# Altium PCB R100.230.010.000-00 Invertor.PcbDoc (part 1 of 2)
Units mm, origin at the board's own origin, x right, y up, seen from the top; angles counter-clockwise.
Board outline 157 x 220 mm, 2 copper layers (Top, Bottom); 111 components, 54 nets, 289 pads, 1436 vias.
Unrouted connection lines stored in the file: 3.
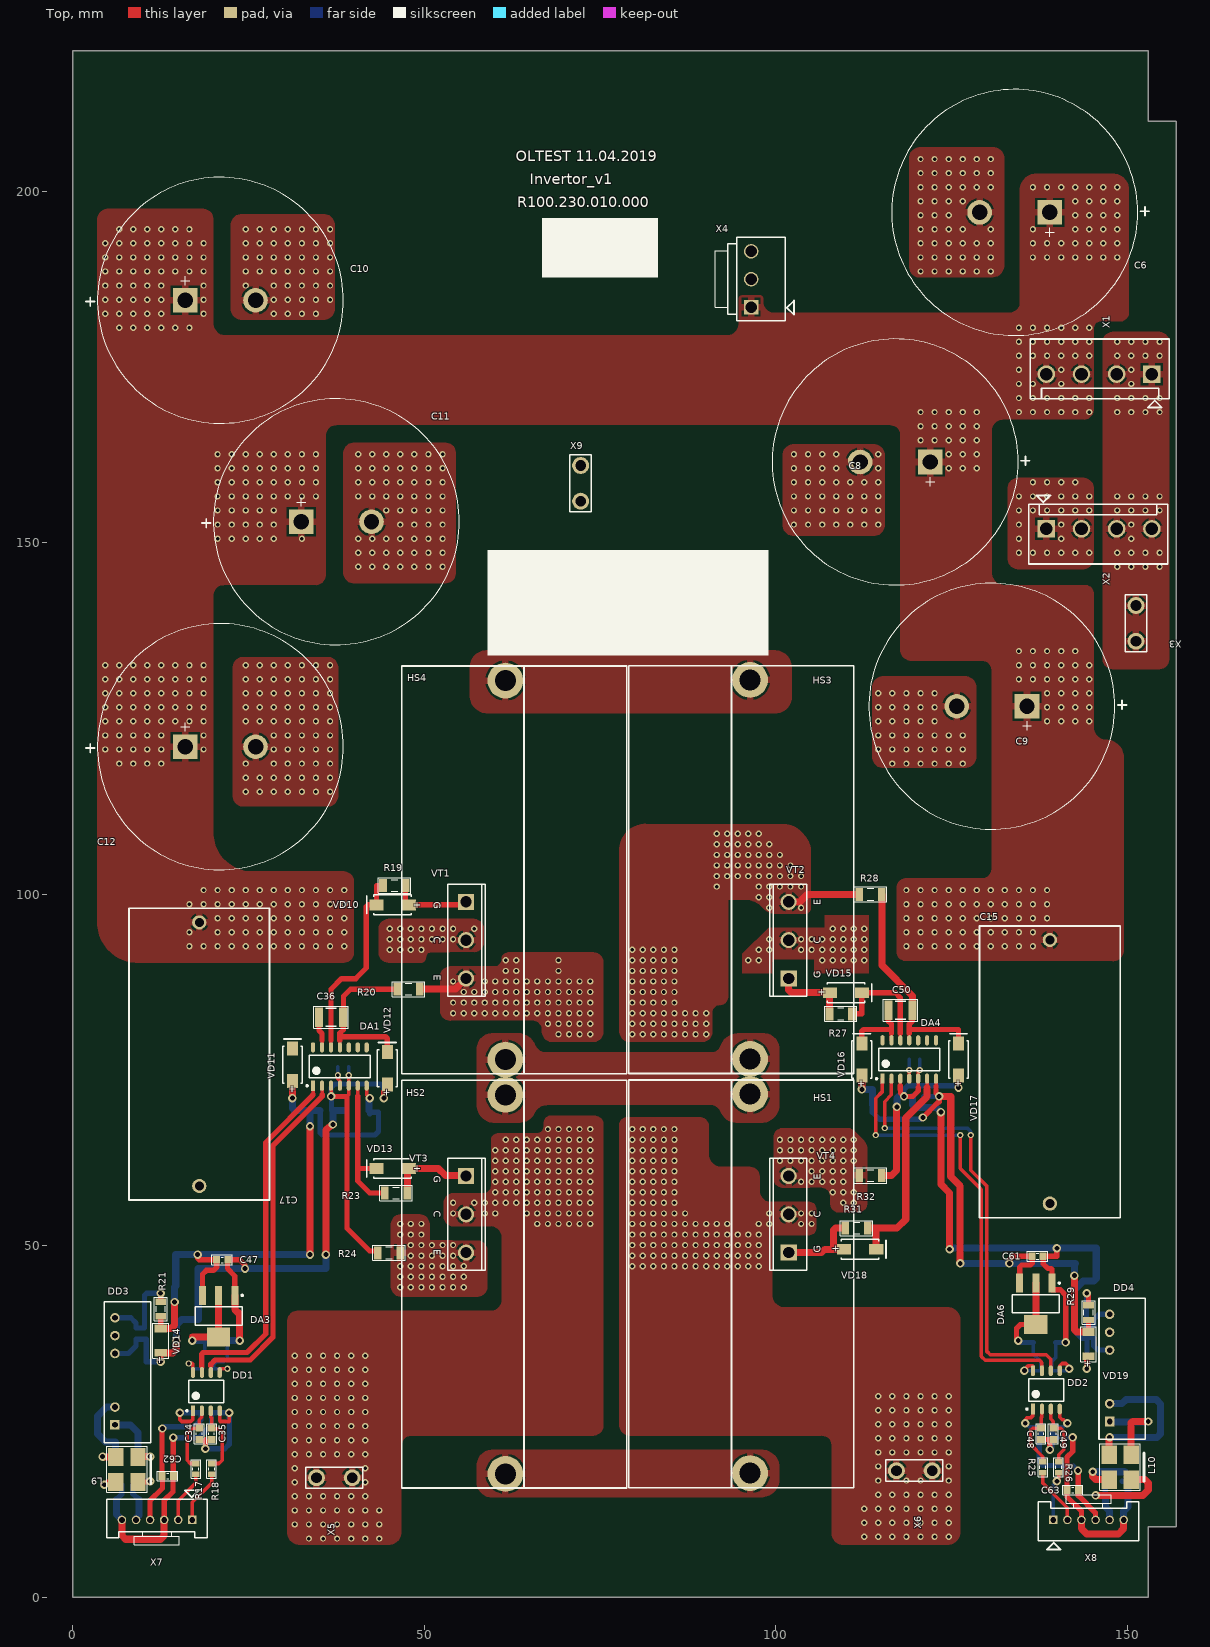
[diagram p0: Top view]
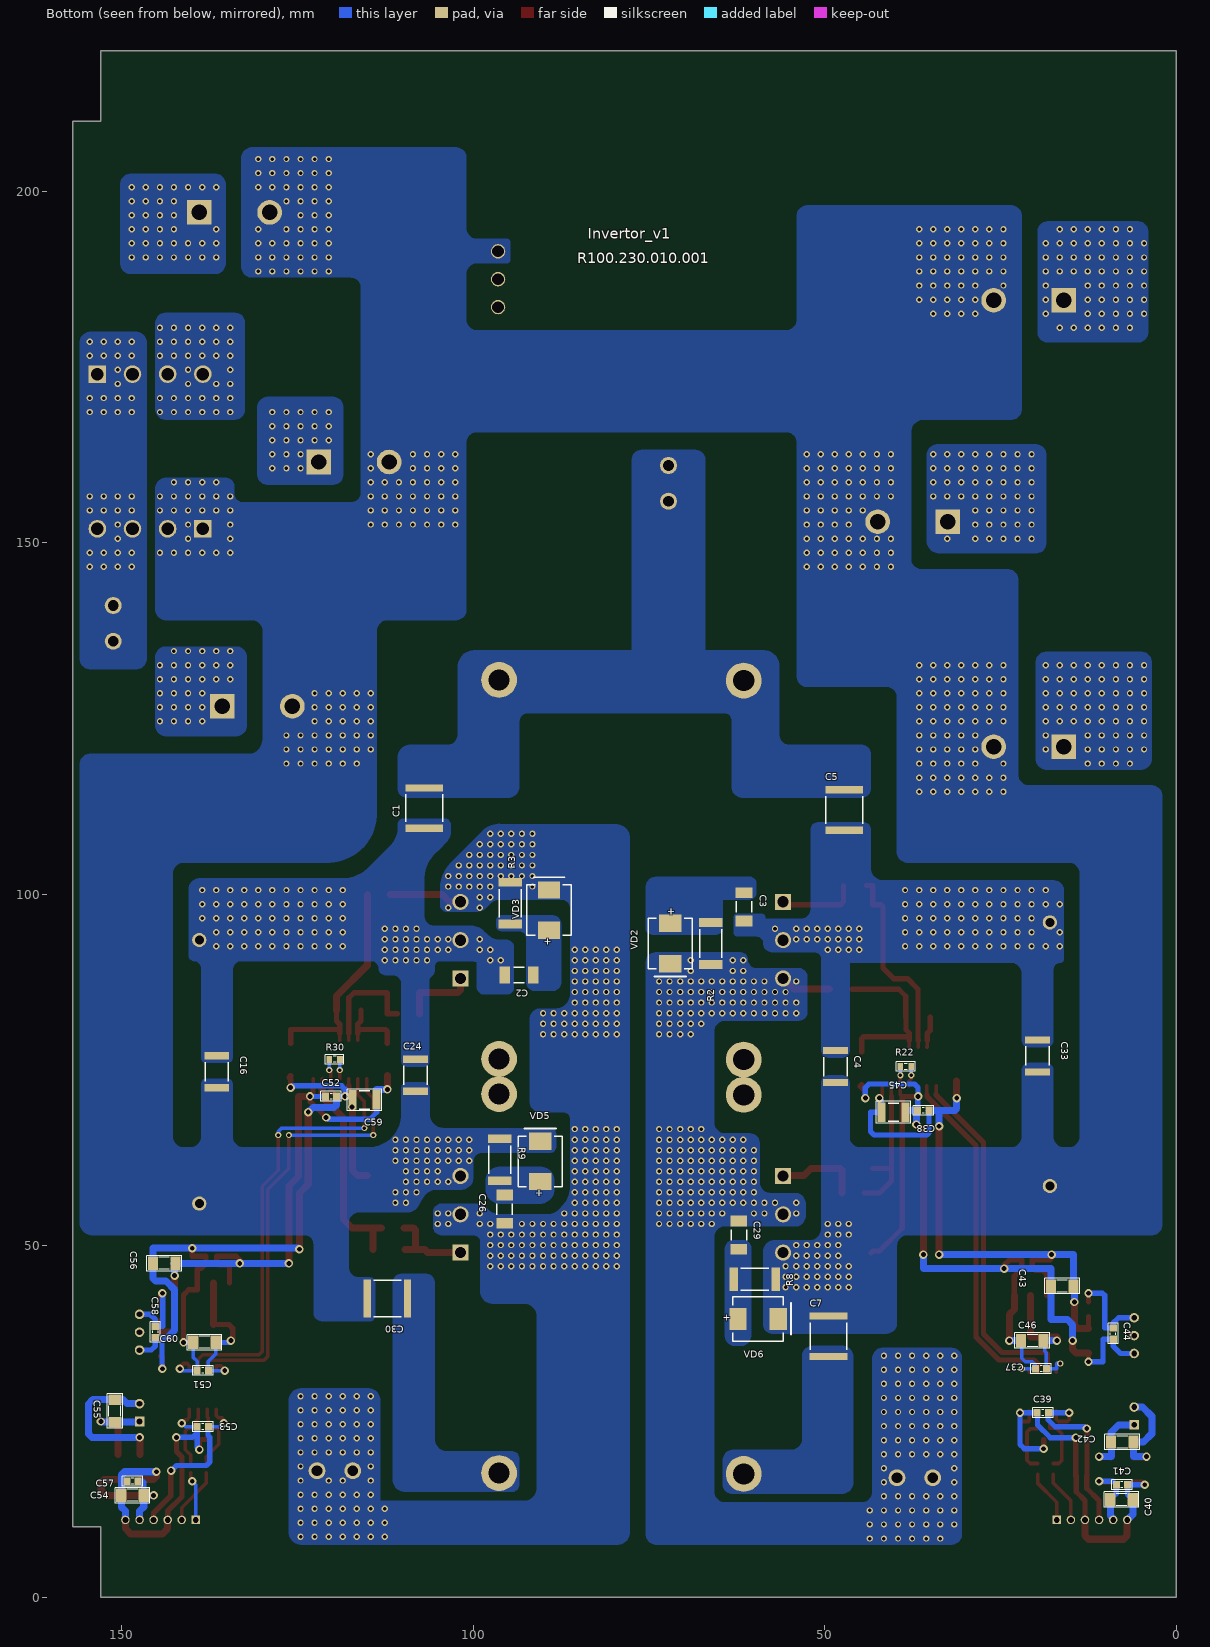
[diagram p1: Bottom view, seen from below]
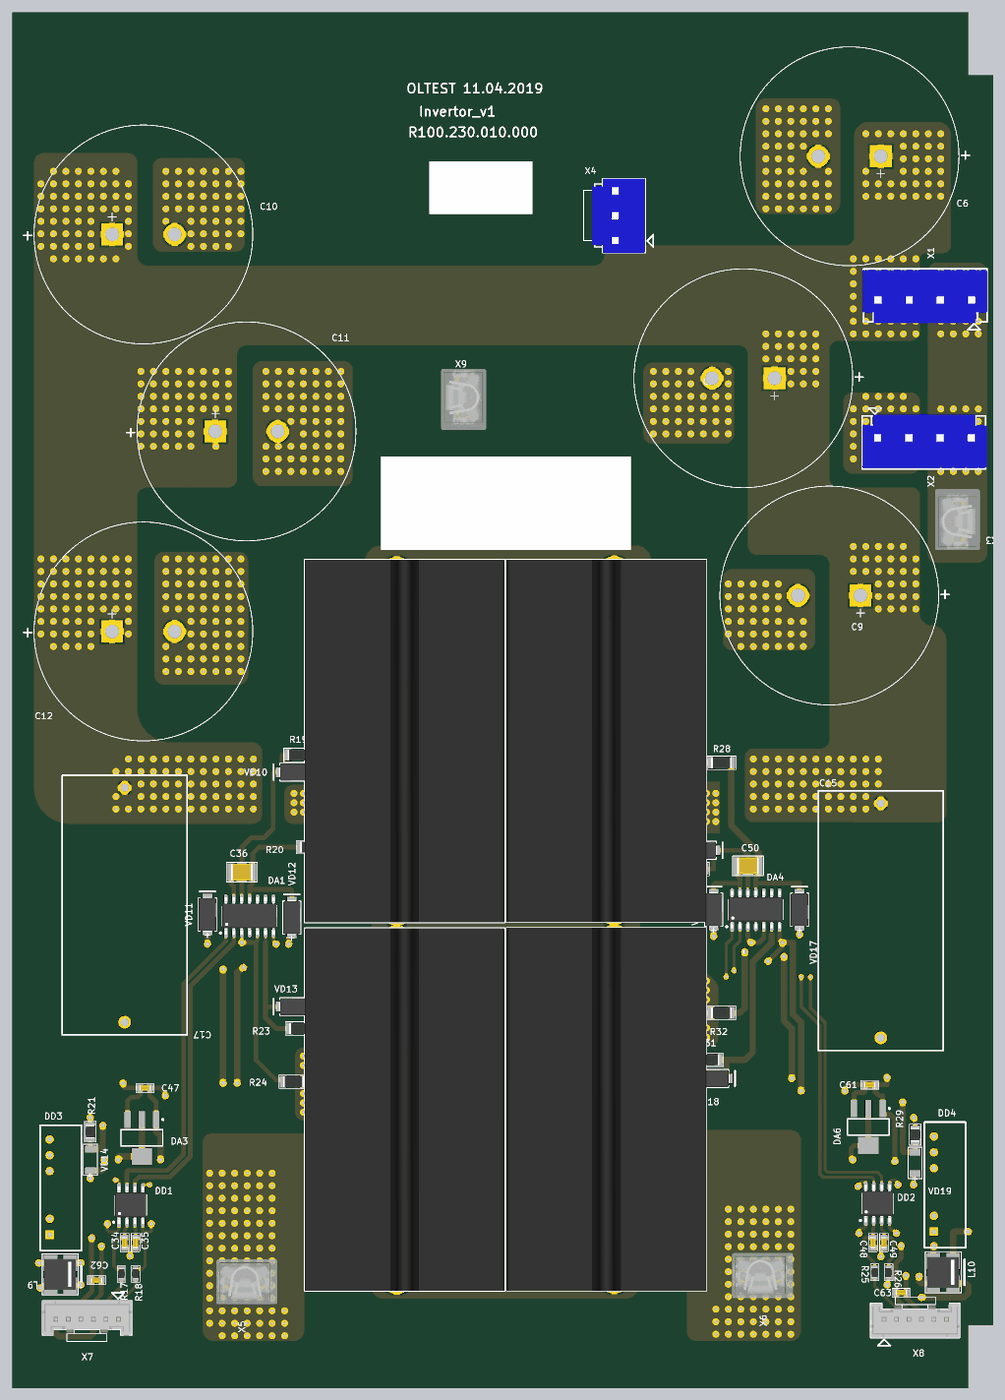
[diagram p3: 3D render of the assembled board from above, using the file's embedded part models]
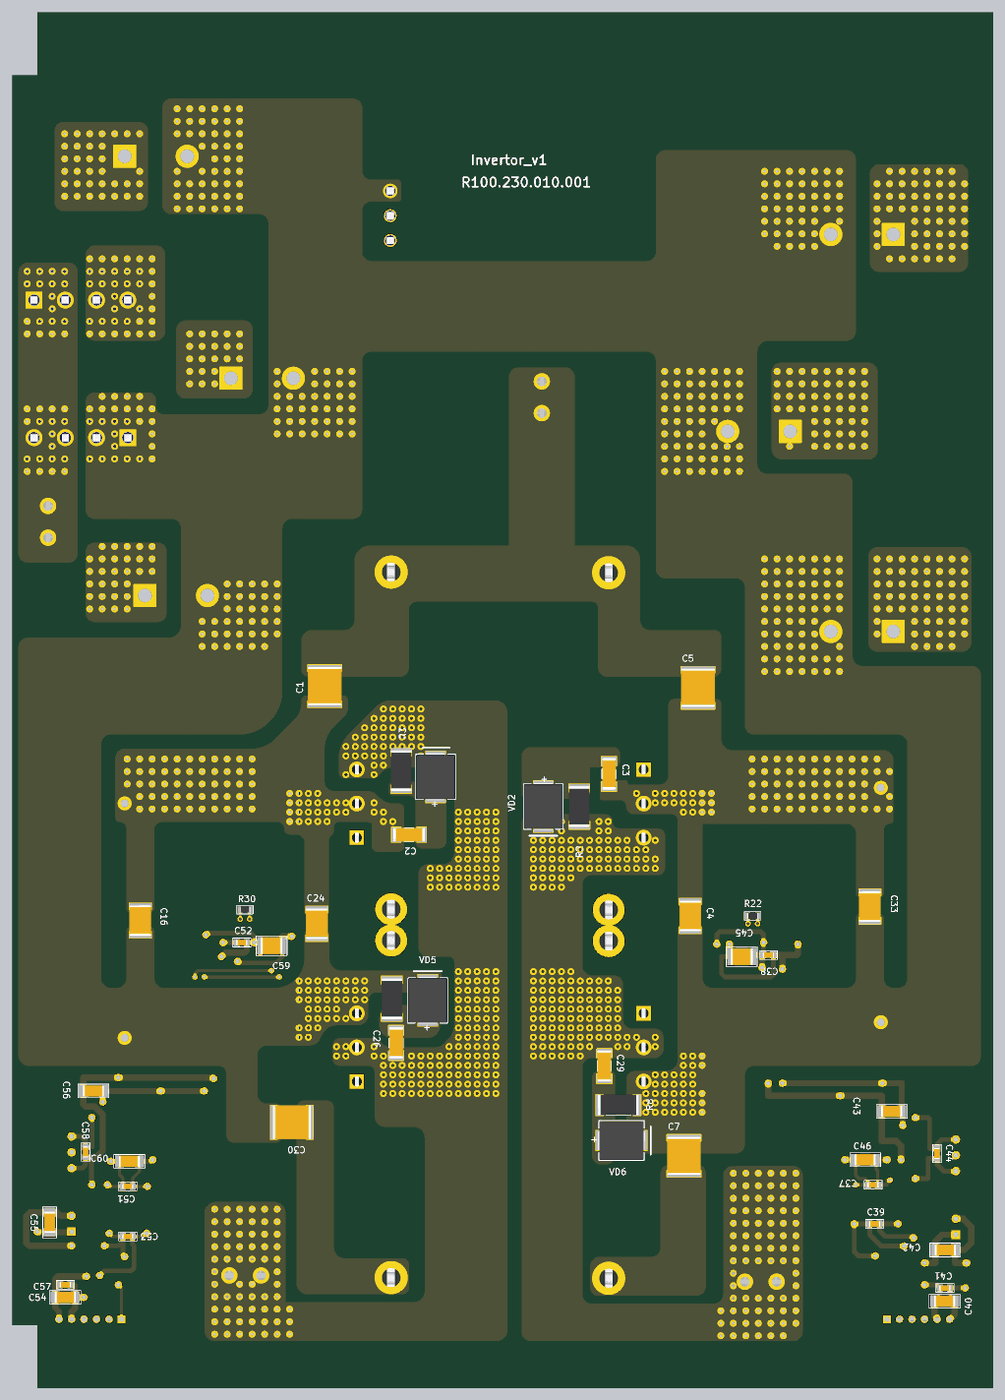
[diagram p4: 3D render of the assembled board from below, using the file's embedded part models]

## Layer stack, top to bottom
Top Solder: solder mask 0.0102, Solder Resist, Dk 3.5
Top: signal copper 0.0356
Dielectric 1: dielectric 0.32, FR-4, Dk 4.8
Bottom: signal copper 0.0356
Bottom Solder: solder mask 0.0102, Solder Resist, Dk 3.5

## Board outline
0,0 0,220 153,220 153,210 157,210 157,10 153,10 153,0

## Design rules (kind name [scope] priority, off if disabled: settings)
BoardOutlineClearance [All] p1: gap=0.5
Clearance Clearance_1 [(ObjectKind = 'Pad') And (Component = 'R10') And (Name = 'R10-2') vs InNet('VOUT-')] p1: gap=0.3
Clearance Clearance_Vout+- [InNet('VOUT+') or InNet('VOUT-')] p2: gap=1
Clearance Clearance_VOUT+-_4_+-Vin [InNet('VOUT+_4') or InNet('VOUT-_4') vs InNet('-VIN_200') or InNet('+VIN_200')] p3: gap=2
Clearance Clearance_VOUT+_4_VOUT-_4 [InNet('VOUT+_4') vs InNet('VOUT-_4')] p4: gap=2
Clearance Clearance_Vout_all [InNet('VOUT+_4') or InNet('VOUT-_4') or  InNet('VOUT+_3') or InNet('VOUT-_3') or InNet('VOUT+_2') or InNet('VOUT-_2') or InNet('VOUT+_1') or InNet('VOUT-_1') or InNet('VOUT+') or InNet('VOUT-')] p5: gap=1.2
Clearance Clearance_xp3_xp2_-Vin_200 [((ObjectKind = 'Pad') And (Component = 'XP3') And (Name = 'XP3-5')) or ((ObjectKind = 'Pad') And (Component = 'XP2') And (Name = 'XP2-5')) vs InNet('-VIN_200')] p6: gap=0.5
Clearance Clearance_+Vin_200_-Vin_200 [InNet('+VIN_200') vs InNet('-VIN_200')] p7: gap=2.2
Clearance Clearance_-Vin_200_All [InNet('-VIN_200') or InNet('+VIN_200')] p8: gap=1.2
Clearance [All] p9: gap=0.3 except(0.4: Arc-Poly Track-Poly SMDPad-Poly THPad-Poly Via-Poly Fill-Poly Poly-Poly)
ComponentClearance ComponentClearance_HS1 [(ObjectKind = 'Component') And (Name = 'HS1') or     (ObjectKind = 'Component') And (Name = 'HS2') or     (ObjectKind = 'Component') And (Name = 'HS3') or     (ObjectKind = 'Component') And (Name = 'HS4')] p1: gap=0.1 collisioncheckmode=3 verticalgap=0.1 showdistances=FALSE
ComponentClearance [All] p2: gap=0.254 collisioncheckmode=3 verticalgap=0.254 showdistances=FALSE
Height [All] p1: minheight=0 maxheight=63.5 prefheight=12.7
HoleSize [All] p1: absolutevalues=TRUE maxlimit=6.35 minlimit=0.025 maxpercent=80.000 minpercent=20.000
PolygonConnect PolygonConnect_shunt [(ObjectKind = 'Pad') And (Component = 'R10') And (Name = 'R10-1') or (ObjectKind = 'Pad') And (Component = 'R10') And (Name = 'R10-3')] p1: connectstyle=Direct reliefconductorwidth=0.254 reliefentries=4 polygonreliefangle="90 Angle" airgapwidth=0.254
PolygonConnect PolygonConnect_snnaber [((ObjectKind = 'Pad') And (Component = 'C3') And (Name = 'C3-2'))  or (ObjectKind = 'Poly') And (Net = 'NetC3_1')  or (ObjectKind = 'Pad') And (Component = 'R2') And (Name = 'R2-1')  or (ObjectKind = 'Pad') And (Component = 'VD2') And (Name = 'VD2-2')  or(ObjectKind = 'Pad') And (Component = 'C29') And (Name = 'C29-2') or (ObjectKind = 'Poly') And (Net = 'NetC29_1') or (ObjectKind = 'Pad') And (Component = 'VD6') And (Name = 'VD6-2') or (ObjectKind = 'Pad') And (Component = 'R8') And (Name = 'R8-1') or (ObjectKind = 'Poly') And (Net = 'N2') And (Name = 'Top Overlay-No Net')] p2: connectstyle=Direct reliefconductorwidth=0.254 reliefentries=4 polygonreliefangle="90 Angle" airgapwidth=0.254
PolygonConnect PolygonConnect_1 [IsStitchingVia] p3: connectstyle=Direct reliefconductorwidth=0.254 reliefentries=4 polygonreliefangle="90 Angle" airgapwidth=0.254
PolygonConnect PolygonConnect_bottom_fill [OnLayer('Bottom')] p4: connectstyle=Direct reliefconductorwidth=0.254 reliefentries=4 polygonreliefangle="90 Angle" airgapwidth=0.254
PolygonConnect PoligonConnect_top [OnLayer('Top')] p5: connectstyle=Relief reliefconductorwidth=1 reliefentries=4 polygonreliefangle="90 Angle" airgapwidth=0.3
RoutingVias [All] p1: holewidth=0.7 width=1.2 viastyle="Through Hole" minholewidth=0.5 minwidth=1 maxholewidth=5.08 maxwidth=7.62
SolderMaskExpansion [All] p1: expansion=0.102
Width Width_+Vin_200 [InNet('+VIN_200')] p1: maxlimit=50 minlimit=0.762 preferedwidth=10 checkconnectedcopper=TRUE
Width [InNet('No Net')] p2: maxlimit=0.254 minlimit=0.254 preferedwidth=0.254
27 further rules are at their usual default settings.

## Classes and differential pairs
component class 01_Invertor: C1 C2 C3 C4 C5 C6 C7 C8 C9 C10 C11 C12 C15 C16 C17 C24 C26 C29 C30 C33 HS1 HS2 HS3 HS4 R2 R3 R8 R9 VD2 VD3 VD5 VD6 VT1 VT2 VT3 VT4 X1 X2 X3 X4 X5 X6 X9
component class 02_Invertor: C34 C35 C36 C37 C38 C39 C40 C41 C42 C43 C44 C45 C46 C47 C48 C49 C50 C51 C52 C53 C54 C55 C56 C57 C58 C59 C60 C61 C62 C63 DA1 DA3 DA4 DA6 DD1 DD2 DD3 DD4 L9 L10 R17 R18 R19 R20 R21 R22 R23 R24 R25 R26 R27 R28 R29 R30 R31 R32 VD10 VD11 VD12 VD13 VD14 VD15 VD16 VD17 VD18 VD19 X7 X8

## Components (designator, comment, footprint, x,y, rotation, side; value= is the part's Value field where it differs from the comment)
C1 "4700pF X1/Y2" SMD_C_2220 107,112.25 r90 bottom
C2 "1.5nF" SMD_C_1808 93.5,88.5 r0 bottom
C3 "1.5nF" SMD_C_1808 61.5,98.225 r270 bottom
C4 "0.1u" SMD_C_1812 48.5,75.5 r90 bottom
C5 "4700pF X1/Y2" SMD_C_2220 47.25,112 r90 bottom
C6 "470uF 450V" El_D35_H45_LS10 139,197 r180 top
C7 "4700pF X1/Y2" SMD_C_2220 49.5,37.125 r90 bottom
C8 "470uF 450V" El_D35_H45_LS10 122,161.5 r180 top
C9 "470uF 450V" El_D35_H45_LS10 135.75,126.75 r180 top
C10 "470uF 450V" El_D35_H45_LS10 16,184.5 r0 top
C11 "470uF 450V" EL_D35_H45_LS10 32.5,153 r0 top
C12 "470uF 450V" EL_D35_H45_LS10 16,121 r0 top
C15 "2.2uF 600VDC" MKP_W20_H39.5_L41.5_LS37.5 139,93.5 r270 top
C16 "0.1u" SMD_C_1812 136.5,74.75 r90 bottom
C17 "2.2uF 600VDC" MKP_W20_H39.5_L41.5_LS37.5 18,96 r270 top
C24 "0.1u" SMD_C_1812 108.25,74.25 r90 bottom
C26 "1.5nF" SMD_C_1808 95.554,55.196 r270 bottom
C29 "1.5nF" SMD_C_1808 62.25,51.5 r90 bottom
C30 "4700pF X1/Y2" SMD_C_2220 112.25,42.5 r180 bottom
C33 "0.1u" SMD_C_1812 19.75,77 r90 bottom
C34 "100p" SMD_C_0603 18,23.25 r270 top
C35 "100p" SMD_C_0603 19.75,23.25 r270 top
C36 "2.2u" SMD_C_1210 36.75,82.5 r0 top
C37 "0.1u" SMD_C_0603 19.25,32.5 r180 bottom
C38 "0.1u" SMD_C_0603 36,69.25 r0 bottom
C39 "0.1u" SMD_C_0603 19,26.25 r180 bottom
C40 "10u" SMD_C_1206 7.8,13.878 r0 bottom
C41 "0.1u" SMD_C_0603 7.75,16 r0 bottom
C42 "10u" SMD_C_1206 7.7,22.078 r0 bottom
C43 "10u" SMD_C_1206 16.25,44.25 r180 bottom
C44 "0.1u" SMD_C_0603 9,37.5 r90 bottom
C45 "2.2u" SMD_C_1210 40.25,69 r180 bottom
C46 "10u" SMD_C_1206 20.5,36.5 r180 bottom
C47 "0.1u" SMD_C_0603 21.25,48 r180 top
C48 "100p" SMD_C_0603 137.75,23.25 r270 top
C49 "100p" SMD_C_0603 139.504,23.25 r270 top
C50 "2.2u" SMD_C_1210 117.75,83.5 r0 top
C51 "0.1u" SMD_C_0603 138.5,32.25 r180 bottom
C52 "0.1u" SMD_C_0603 120.25,71.25 r180 bottom
C53 "0.1u" SMD_C_0603 138.5,24.25 r180 bottom
C54 "10u" SMD_C_1206 148.5,14.5 r180 bottom
C55 "10u" SMD_C_1206 151,26.5 r270 bottom
C56 "10u" SMD_C_1206 144,47.5 r180 bottom
C57 "0.1u" SMD_C_0603 148.5,16.5 r180 bottom
C58 "0.1u" SMD_C_0603 145.25,37.75 r90 bottom
C59 "2.2u" SMD_C_1210 115.5,70.75 r0 bottom
C60 "10u" SMD_C_1206 138.25,36.25 r180 bottom
C61 "0.1u" SMD_C_0603 137.25,48.5 r180 top
C62 "1u" SMD_C_0603 13.5,17.25 r0 top
C63 "1u" SMD_C_0603 142.25,15.25 r180 top
DA1 "IRS21844S" SOIC-14(127P600X175) 38,75.5 r90 top
DA3 "TLV1117-50IDCY" SOT-223_M 20.75,40 r270 top
DA4 "IRS21844S" SOIC-14(127P600X175) 119,76.5 r90 top
DA6 "TLV1117-50IDCY" SOT-223_M 137,41.75 r270 top
DD1 "ADUM3200ARZ" SOIC-8 19,29.25 r90 top
DD2 "ADUM3200ARZ" SOIC-8 138.5,29.5 r90 top
DD3 "TMV1215S" SIP7 6,24.518 r90 top
DD4 "TMV1215S" SIP7 147.5,25 r90 top
HS1 "Heat Sink C40-058-VE" "HEAT SINK C40-058-VE" 96.35,71.575 r0 top
HS2 "Heat Sink C40-058-VE" "HEAT SINK C40-058-VE" 61.55,17.55 r180 top
HS3 "Heat Sink C40-058-VE" "HEAT SINK C40-058-VE" 96.35,130.5 r0 top
HS4 "Heat Sink C40-058-VE" "HEAT SINK C40-058-VE" 61.55,76.475 r180 top
L9 "DLW5BSM302SQ2" DLW5BS(AH) 7.7,18.178 r90 top
L10 "DLW5BSM302SQ2" DLW5BS(AH) 149,18.5 r90 top
R2 "4.7" SMD_R_2512 66.25,93 r90 bottom
R3 "4.7" SMD_R_2512 94.75,98.75 r270 bottom
R8 "4.7" SMD_R_2512 60,45.25 r0 bottom
R9 "4.7" SMD_R_2512 96.25,62.25 r270 bottom
R17 "100" SMD_R_0603 17.5,18.25 r90 top
R18 "100" SMD_R_0603 19.75,18.25 r90 top
R19 "6.2" SMD_R_1206 45.75,101.25 r0 top
R20 "1" SMD_R_1206 47.75,86.5 r0 top
R21 "49.9" SMD_R_0805 12.5,41 r270 top
R22 "0R" SMD_R_0603 38.5,75.5 r180 bottom
R23 "6.2" SMD_R_1206 46,57.5 r0 top
R24 "1" SMD_R_1206 45,49 r0 top
R25 "100" SMD_R_0603 138,18.5 r90 top
R26 "100" SMD_R_0603 140.25,18.5 r90 top
R27 "6.2" SMD_R_1206 109.25,83 r180 top
R28 "1" SMD_R_1206 113.5,100 r180 top
R29 "49.9" SMD_R_0805 144.5,40.5 r270 top
R30 "0R" SMD_R_0603 119.75,76.5 r180 bottom
R31 "6.2" SMD_R_1206 111.5,52.5 r180 top
R32 "1" SMD_R_1206 113.5,60 r180 top
VD2 "STTH4R02S" SMC 72,93 r270 bottom
VD3 "STTH4R02S" SMC 89.25,97.75 r90 bottom
VD5 "STTH4R02S" SMC 90.5,62 r90 bottom
VD6 "STTH4R02S" SMC 59.5,39.596 r180 bottom
VD10 "ES1B" DO-214AC 45.5,98.5 r180 top
VD11 "US1M" DO-214AC 31.25,75.75 r90 top
VD12 "US1M" DO-214AC 44.75,75.25 r90 top
VD13 "ES1B" DO-214AC 45.5,61 r180 top
VD14 "BZV55-C16" SOD80C 12.5,36.5 r90 top
VD15 "ES1B" DO-214AC 110,86 r0 top
VD16 "US1M" DO-214AC 112.25,76.5 r90 top
VD17 "US1M" DO-214AC 126,76.5 r90 top
VD18 "ES1B" DO-214AC 112,49.5 r0 top
VD19 "BZV55-C16" SOD80C 144.5,36 r90 top
VT1 "IRG4PC40UD" TO-247AC-3PINS 55.95,93.475 r270 top
VT2 "IRG4PC40UD" TO-247AC-3PINS 101.85,93.475 r90 top
VT3 "IRG4PC40UD" TO-247AC-3PINS 55.95,54.475 r270 top
VT4 "IRG4PC40UD" TO-247AC-3PINS 101.85,54.475 r90 top
X1 "B04P-NV" B04P-NV 153.5,174 r180 top
X2 "B04P-NV" B04P-NV 138.5,152 r0 top
X3 "63849-1" 63849-1+insulator(154719-1) 151.25,141.08 r270 top
X4 "B3P-VH" B3P-VH 96.5,183.54 r90 top
X5 "63849-1" 63849-1+insulator(154719-1) 39.75,17 r180 top
X6 "63849-1" 63849-1+insulator(154719-1) 122.25,18 r180 top
X7 "Sherlock 6" 35362-0650 17,11 r0 top
X8 "Sherlock 6" 35362-0650 139.5,11 r180 top
X9 "63849-1" 63849-1+insulator(154719-1) 72.25,155.92 r90 top

## Footprints (in the part's own frame and the unit in brackets; to place one, negate y for a bottom-side part, rotate by r counter-clockwise, add the part's x,y. Pads: shape width x height; smd on the part's side, far side on the other; paste and mask are expansions set on the pad)
35362-0650 [mil]
  rect 48x48 / inner round 0 / far side rect 48x48 hole 32 mask+4.97: 1(0,0)
  round 48 / inner round 0 / far side round 48 hole 32 mask+4.97: 2(-78.73,0) 3(-157.47,0) 4(-236.22,0) 5(-314.95,0) 6(-394,0)
  silkscreen extent -478,-140 85,166, body extent -478,-102 85,116, height 335
63849-1+insulator(154719-1) [mil]
  round 95 hole 60: 1(0,0) 2(200,0)
  silkscreen extent -60,-60 260,60, body extent -106,-141 279,142, height 955
B3P-VH [mm]
  rect 2.057x2.057 / inner round 0 / far side round 2.057 hole 1.65 mask+0.128: 1(0,0)
  round 2.057 / inner round 0 / far side round 2.057 hole 1.65 mask+0.128: 2(3.96,0) 3(7.92,0)
  silkscreen extent -1.95,-6.1 9.91,5.08, body extent -1.95,-4.78 9.87,3.72, height 10.93
B04P-NV [mm]
  rect 2.5x2.5 hole 1.8: 1(0,0)
  round 2.5 hole 1.8: 2(5,0) 3(10,0) 4(15,0)
  silkscreen extent -2.5,-5 17.27,4.75, body extent -2.52,-4.83 17.47,3.68, height 10.9
DLW5BS(AH) [mil] "SMD Inductor"
  rect 102.24x86 smd: 1(-70,-62) 2(70,-62) 3(70,62) 4(-70,62)
  silkscreen extent -129,-134 130,114, body extent -98,-96 98,100, height 96
DO-214AC [mm] "Molded Diode, 2-Leads, Body 5,10x2,67mm, IPC Medium Density"
  rect 2x1.55 smd: 1(-2.3,0) 2(2.3,0)
  silkscreen extent -2.65,-1.4 3.67,1.4, body extent -2.86,-1.4 2.86,1.4, height 2.3
El_D35_H45_LS10 [mm]
  rect 3.5x3.5 hole 2.2: 1(0,0)
  round 3.5 hole 2.2 mask+0.102: 2(10,0)
  silkscreen extent -14.15,-17.5 22.5,17.5, body extent -12.5,-17.5 22.5,17.5, height 45
EL_D35_H45_LS10 [mm]
  rect 3.5x3.5 hole 2.2: 1(0,0)
  round 3.5 hole 2.2 mask+0.102: 2(10,0)
  silkscreen extent -14.15,-17.5 22.5,17.5, body extent -12.5,-17.5 22.5,17.5, height 45
"HEAT SINK C40-058-VE" [mm]
  round 5.1 hole 3: 1(0,0) 2(0,-53.925)
  silkscreen extent -17.25,-56 14.75,2, body extent -17.25,-56 14.75,2, height 46.4
MKP_W20_H39.5_L41.5_LS37.5 [mil]
  round 80 hole 50: 1(0,0) 2(1476.38,0)
  silkscreen extent -79,-394 1555,394, body extent -84,-399 1560,399, height 1555
SIP7 [mm]
  rect 1.36x1.36 hole 0.8 mask+0.102: 1(0,0)
  round 1.36 hole 0.8 mask+0.102: 2(2.54,0) 5(10.16,0) 6(12.7,0) 7(15.24,0)
  silkscreen extent -2.54,-5.08 17.53,1.52, body extent -2.54,-5.08 17.53,1.52, height 10.16
SMC [mm] "Molded Diode, 2-Leads, Body 6,88x5,90mm, IPC Medium Density"
  rect 2.45x3.15 smd: 1(-2.875,0) 2(2.875,0)
  silkscreen extent -3.6,-3.15 4.67,3.15, body extent -3.79,-3.13 3.79,3.13, height 2.45
SMD_C_0603 [mm]
  rect 1x1.1 smd: 1(-0.8,0) 2(0.8,0)
  silkscreen extent -1.45,-0.7 1.45,0.7, body extent -0.9,-0.45 0.9,0.45, height 0.7
SMD_C_1206 [mm]
  rect 1.45x1.9 smd: 1(-1.6,0) 2(1.6,0)
  silkscreen extent -2.47,-1.1 2.47,1.1, body extent -1.7,-0.9 1.7,0.9, height 1.6
SMD_C_1210 [mm] "Chip Capacitor, 2-Leads, Body 3,20x2,50mm, IPC Low Density"
  rect 1.15x2.8 smd: 1(-1.725,0) 2(1.725,0)
  silkscreen extent -2.47,-1.55 2.47,1.57, body extent -1.75,-1.35 1.75,1.35, height 2.5
SMD_C_1808 [mm] "Chip Capacitor, 2-Leads, Body 4,60x2,00mm, IPC Medium Density"
  rect 1.5x2.4 smd: 1(-2.025,0) 2(2.025,0)
  silkscreen extent -0.75,-1.1 0.75,1.1, body extent -2.55,-1.1 2.55,1.1, height 2.2
SMD_C_1812 [mm] "Chip Capacitor, 2-Leads, Body 4,50x3,20mm, IPC Medium Density"
  rect 1.05x3.5 smd: 1(-2.275,0) 2(2.275,0)
  silkscreen extent -1.35,-1.65 1.35,1.65, body extent -2.45,-1.75 2.45,1.75, height 2
SMD_C_2220 [mm]
  rect 1.05x5.4 smd: 1(-2.875,0) 2(2.875,0)
  silkscreen extent -1.95,-2.6 1.95,2.6, body extent -3.05,-2.7 3.05,2.7, height 2
SMD_R_0603 [mm]
  rect 0.8x1.05 smd: 1(-0.775,0) 2(0.775,0)
  silkscreen extent -1.33,-0.67 1.33,0.67, body extent -0.82,-0.47 0.82,0.48, height 0.5
SMD_R_0805 [mm]
  rect 0.9x1.5 smd: 1(-1.05,0) 2(1.05,0)
  silkscreen extent -1.68,-0.92 1.68,0.92, body extent -1.1,-0.7 1.1,0.7, height 0.5
SMD_R_1206 [mm]
  rect 1.1x1.85 smd: 1(-1.6,0) 2(1.6,0)
  silkscreen extent -2.3,-1.07 2.3,1.07, body extent -1.65,-0.87 1.65,0.87, height 0.6
SMD_R_2512 [mm]
  rect 1.23x3.33 smd: 1(-2.985,0) 2(2.985,0)
  silkscreen extent -2,-1.57 2,1.57, body extent -3.25,-1.65 3.25,1.65, height 0.6
SOD80C [mm] "MELF Diode, 2-Leads, Body 3,50x1,53mm, IPC Medium Density"
  rect 1.1x1.75 smd: 1(-1.725,0) 2(1.725,0)
  silkscreen extent -2.5,-1.12 2.5,1.12, body extent -1.85,-0.8 1.85,0.8, height 1.6
SOIC-8 [mm]
  rect 1.55x0.6 smd: 1(-2.725,1.905)
  oval 1.55x0.6 smd: 2(-2.725,0.635) 3(-2.725,-0.635) 4(-2.725,-1.905) 5(2.725,-1.905) 6(2.725,-0.635) 7(2.725,0.635) 8(2.725,1.905)
  silkscreen extent -2.85,-2.5 1.6,2.88, body extent -3,-2.5 3,2.5, height 1.75
SOIC-14(127P600X175) [mm] "SOIC, 14-Leads, Body 8,65x3,90mm, Pitch 1,27mm, IPC Medium Density"
  rect 1.45x0.6 smd: 1(-2.725,3.81)
  oval 1.45x0.6 smd: 2(-2.725,2.54) 3(-2.725,1.27) 4(-2.725,0) 5(-2.725,-1.27) 6(-2.725,-2.54) 7(-2.725,-3.81) 8(2.725,-3.81) 9(2.725,-2.54) 10(2.725,-1.27) 11(2.725,0) 12(2.725,1.27) 13(2.725,2.54) 14(2.725,3.81)
  silkscreen extent -2.85,-4.35 1.6,4.78, body extent -3,-4.35 3,4.35, height 1.75
SOT-223_M [mm] "SOT223, 4-Leads, Body 6.5x3.5mm, Pitch 2.3mm, Lead Span 7mm, IPC Low Density"
  rect 2.7x1 smd: 1(-2.95,2.3) 2(-2.95,0) 3(-2.95,-2.3)
  rect 2.7x3.3 smd: 4(2.95,0)
  silkscreen extent -3.07,-3.35 1.3,3.48, body extent -1.85,-3.35 1.85,3.35, height 1.8
TO-247AC-3PINS [mm] "SIP with Mounting Hole; 3 Leads; Body 20 x 15.6 x 5 mm (typ); Pitch 5.45 mm"
  rect 2.3x2.3 hole 1.6: 1(-5.45,0)
  round 2.3 hole 1.6: 2(0,0) 3(5.45,0)
  silkscreen extent -7.95,-2.6 7.95,2.7, body extent -7.75,-3 7.75,2, height 30.5

## Part data
C1 C5 C7 C30: library part "C X1Y2 4700pF SMD 2220 250Vac 10%", "SMD C2220 MURATA 250Vac 10% X7R X1Y2"
C2 C3 C26 C29: library part "C1808 1.5nF 2KV 10%", "SMD C 1808 AVX 2kV 10%  X7R"
C4 C16 C24 C33: library part "C1812 0.1u 630V 10%", "SMD C 1812 MURATA 630V 10% X7R"
C6 C8 C9 C10 C11 C12: library part "FC 470uF 20% 450V", "Aluminum Electrolytic Radial D35 H45 LS10 450V 20%"
C15 C17: library part "MKP1 2.2uF 10% 600VDC", "Polypropelene W20 H39.5 L41.5 LS37.5 600VDC 10%"
C34 C35 C48 C49: library part "C0603 100p 100V 5%", "SMD C 0603 MURATA 100V 5% NP0"
C36 C45 C50 C59: library part "C1210 2.2u 100V 10%", "SMD C 1210 MURATA 100V 10% X7R"
C37 C38 C39 C41 C44 C47 C51 C52 C53 C57 C58 C61: library part "C0603 0.1u 50V 10%", "SMD C 0603 MURATA 50V 10% X7R"
C40 C42 C43 C46 C54 C55 C56 C60: library part "C1206 10u 25V 20%", "SMD C 1206 MURATA 25V 20% X5R"
C62 C63: library part "C0603 1uF 25V 10%", "SMD C 0603 MURATA 25V 10% X7R"
DA1 DA4: "Half-Bridge Driver"
DA3 DA6: "Voltage regulator 5.0V 800mA"
DD1 DD2: "Dual Channel Digital Isolator, Enhanced System-Level ESD Reliability, 2.5 KV rms Insulation Rating, 1 Mbps Data Rate, 150 ns Delay, Industrial, 8-pin SOIC (R-8), Tube"
DD3 DD4: "DC/DC"
HS1 HS2 HS3 HS4: "Heat Sink"
L9 L10: "SMD Common Mode Choke Coil 0.5A Z = 3000 Ohm / 100 MHz"
R2 R3 R8 R9: library part "R2512 4.7 1%", "SMD R 2512 VISHAY 1W 500V 1% 100ppm"
R17 R18 R25 R26: library part "R0603 100 1%", "SMD R 0603 VISHAY 0.1W 75V 1% 100ppm"
R19 R23 R27 R31: library part "R1206 6.2 1%", "SMD R 1206 VISHAY 0.25W 200V 1% 100ppm"
R20 R24 R28 R32: library part "R1206 1 1%", "SMD R 1206 VISHAY 0.25W 200V 1% 100ppm"
R21 R29: library part "R0805 49.9 1%", "SMD R 0805 VISHAY 0.125W 150V 1% 100ppm"
R22 R30: library part "R0603 0R 1%", "SMD R 0603 VISHAY 0.1W 75V 1% 100ppm"
VD2 VD3 VD5 VD6: "If=4A, Vf=0.76V Vrrm=200V Diode (SMC)"
VD10 VD13 VD15 VD18: "Vr=100V If=1A Ultrafast"
VD11 VD12 VD16 VD17: "Vr=1000V If=1A Ultrafast"
VD14 VD19: "0.5W Vz=16V +-5%"
VT1 VT2 VT3 VT4: "Insulated Gate Bipolar Transistor with Ultrafast Soft Recovery Diode"
X1 X2: "NV 4 конт LS=5.0 10A 250V PCB"
X3 X5 X6 X9: "PCB, 6.3х0.8, hole"
X4: "VH Top, 10A 250V 3.96mm"
X7 X8: library part 35363-0650, "Sherlock 6 Side, 2A 125V 2mm"

## Via types
v1: diameter 0.9, hole 0.5, Top to Bottom, 1383 vias
v2: diameter 1.2, hole 0.7, Top to Bottom, 53 vias

## Nets (pads, with @x,y where several pads share a name; then routed paths per layer and width w, separated by ;. In a path a pad name is that pad's centre, name@x,y a point inside that pad or via, vN(x,y) a via of type N, cw(c..) or ccw(c..) an arc to the next point about the centre after c; other vN are vias at no path point)
+VIN_200: C1.1 C2.2 C3.2 C4.2 C5.1 C6.1 C8.1 C9.1 C10.1 C11.1 C12.1 C15.1 C16.2 C17.1 C24.2 C33.2 VT1.2 VT2.2 X1.3 X1.4 X4.1
  other v1: 96.1,90.6 97.6,90.6 106.6,90.6 108.1,90.6 109.6,90.6 111.1,90.6 112.6,90.6 45.1,92.1 46.6,92.1 48.1,92.1 49.6,92.1 97.6,92.1 99.1,92.1 103.6,92.1 105.1,92.1 106.6,92.1 108.1,92.1 109.6,92.1 111.1,92.1 112.6,92.1 16.6,92.6 18.6,92.6 20.6,92.6 22.6,92.6 24.6,92.6 26.6,92.6 28.6,92.6 30.6,92.6 32.6,92.6 34.6,92.6 36.6,92.6 38.6,92.6 118.6,92.6 120.6,92.6 122.6,92.6 124.6,92.6 126.6,92.6 128.6,92.6 130.6,92.6 132.6,92.6 134.6,92.6 136.6,92.6 45.1,93.6 46.6,93.6 48.1,93.6 49.6,93.6 51.1,93.6 52.6,93.6 54.1,93.6 99.1,93.6 103.6,93.6 105.1,93.6 106.6,93.6 108.1,93.6 109.6,93.6 111.1,93.6 112.6,93.6 16.6,94.6 20.6,94.6 22.6,94.6 24.6,94.6 26.6,94.6 28.6,94.6 30.6,94.6 32.6,94.6 34.6,94.6 36.6,94.6 38.6,94.6 118.6,94.6 120.6,94.6 122.6,94.6 124.6,94.6 126.6,94.6 128.6,94.6 130.6,94.6 132.6,94.6 134.6,94.6 136.6,94.6 45.1,95.1 46.6,95.1 48.1,95.1 49.6,95.1 51.1,95.1 52.6,95.1 54.1,95.1 57.1,95.1 108.1,95.1 109.6,95.1 111.1,95.1 112.6,95.1 20.6,96.6 22.6,96.6 24.6,96.6 26.6,96.6 28.6,96.6 30.6,96.6 32.6,96.6 34.6,96.6 36.6,96.6 38.6,96.6 118.6,96.6 120.6,96.6 122.6,96.6 124.6,96.6 126.6,96.6 128.6,96.6 130.6,96.6 132.6,96.6 134.6,96.6 136.6,96.6 138.6,96.6 16.6,98.6 18.6,98.6 20.6,98.6 22.6,98.6 24.6,98.6 26.6,98.6 28.6,98.6 30.6,98.6 32.6,98.6 34.6,98.6 36.6,98.6 38.6,98.6 118.6,98.6 120.6,98.6 122.6,98.6 124.6,98.6 126.6,98.6 128.6,98.6 130.6,98.6 132.6,98.6 134.6,98.6 136.6,98.6 138.6,98.6 18.6,100.6 20.6,100.6 22.6,100.6 24.6,100.6 26.6,100.6 28.6,100.6 30.6,100.6 32.6,100.6 34.6,100.6 36.6,100.6 38.6,100.6 118.6,100.6 120.6,100.6 122.6,100.6 124.6,100.6 126.6,100.6 128.6,100.6 130.6,100.6 132.6,100.6 134.6,100.6 136.6,100.6 138.6,100.6 6.6,118.6 8.6,118.6 10.6,118.6 12.6,118.6 4.6,120.6 6.6,120.6 8.6,120.6 10.6,120.6 12.6,120.6 18.6,120.6 4.6,122.6 6.6,122.6 8.6,122.6 10.6,122.6 12.6,122.6 18.6,122.6 4.6,124.6 6.6,124.6 8.6,124.6 10.6,124.6 12.6,124.6 14.6,124.6 16.6,124.6 18.6,124.6 138.6,124.6 140.6,124.6 142.6,124.6 144.6,124.6 4.6,126.6 6.6,126.6 8.6,126.6 10.6,126.6 12.6,126.6 14.6,126.6 16.6,126.6 18.6,126.6 138.6,126.6 140.6,126.6 142.6,126.6 144.6,126.6 4.6,128.6 6.6,128.6 8.6,128.6 10.6,128.6 12.6,128.6 14.6,128.6 16.6,128.6 18.6,128.6 138.6,128.6 140.6,128.6 142.6,128.6 144.6,128.6 4.6,130.6 6.6,130.6 8.6,130.6 10.6,130.6 12.6,130.6 14.6,130.6 16.6,130.6 18.6,130.6 134.6,130.6 136.6,130.6 138.6,130.6 140.6,130.6 142.6,130.6 144.6,130.6 4.6,132.6 6.6,132.6 8.6,132.6 10.6,132.6 12.6,132.6 14.6,132.6 16.6,132.6 18.6,132.6 134.6,132.6 136.6,132.6 138.6,132.6 140.6,132.6 142.6,132.6 144.6,132.6 134.6,134.6 136.6,134.6 138.6,134.6 140.6,134.6 142.6,134.6 20.6,150.6 22.6,150.6 24.6,150.6 26.6,150.6 28.6,150.6 32.6,150.6 20.6,152.6 22.6,152.6 24.6,152.6 26.6,152.6 28.6,152.6 20.6,154.6 22.6,154.6 24.6,154.6 26.6,154.6 28.6,154.6 20.6,156.6 22.6,156.6 24.6,156.6 26.6,156.6 28.6,156.6 30.6,156.6 32.6,156.6 34.6,156.6 20.6,158.6 22.6,158.6 24.6,158.6 26.6,158.6 28.6,158.6 30.6,158.6 32.6,158.6 34.6,158.6 20.6,160.6 22.6,160.6 24.6,160.6 26.6,160.6 28.6,160.6 30.6,160.6 32.6,160.6 34.6,160.6 124.6,160.6 126.6,160.6 128.6,160.6 20.6,162.6 22.6,162.6 24.6,162.6 26.6,162.6 28.6,162.6 30.6,162.6 32.6,162.6 34.6,162.6 124.6,162.6 126.6,162.6 128.6,162.6 120.6,164.6 122.6,164.6 124.6,164.6 126.6,164.6 128.6,164.6 120.6,166.6 122.6,166.6 124.6,166.6 126.6,166.6 128.6,166.6 120.6,168.6 122.6,168.6 124.6,168.6 126.6,168.6 128.6,168.6 134.6,168.6 136.6,168.6 138.6,168.6 140.6,168.6 142.6,168.6 144.6,168.6 134.6,170.6 136.6,170.6 138.6,170.6 140.6,170.6 142.6,170.6 144.6,170.6 134.6,172.6 136.6,172.6 140.6,172.6 134.6,174.6 140.6,174.6 134.6,176.6 136.6,176.6 138.6,176.6 140.6,176.6 142.6,176.6 144.6,176.6 134.6,178.6 136.6,178.6 138.6,178.6 140.6,178.6 142.6,178.6 144.6,178.6 6.6,180.6 8.6,180.6 10.6,180.6 12.6,180.6 14.6,180.6 16.6,180.6 134.6,180.6 136.6,180.6 138.6,180.6 140.6,180.6 142.6,180.6 144.6,180.6 4.6,182.6 6.6,182.6 8.6,182.6 10.6,182.6 12.6,182.6 18.6,182.6 4.6,184.6 6.6,184.6 8.6,184.6 10.6,184.6 12.6,184.6 18.6,184.6 4.6,186.6 6.6,186.6 8.6,186.6 10.6,186.6 12.6,186.6 18.6,186.6 4.6,188.6 6.6,188.6 8.6,188.6 10.6,188.6 12.6,188.6 14.6,188.6 16.6,188.6 18.6,188.6 4.6,190.6 6.6,190.6 8.6,190.6 10.6,190.6 12.6,190.6 14.6,190.6 16.6,190.6 18.6,190.6 136.6,190.6 138.6,190.6 140.6,190.6 142.6,190.6 144.6,190.6 146.6,190.6 148.6,190.6 4.6,192.6 6.6,192.6 8.6,192.6 10.6,192.6 12.6,192.6 14.6,192.6 16.6,192.6 18.6,192.6 136.6,192.6 138.6,192.6 140.6,192.6 142.6,192.6 144.6,192.6 146.6,192.6 148.6,192.6 6.6,194.6 8.6,194.6 10.6,194.6 12.6,194.6 14.6,194.6 16.6,194.6 136.6,194.6 142.6,194.6 144.6,194.6 146.6,194.6 148.6,194.6 142.6,196.6 144.6,196.6 146.6,196.6 148.6,196.6 142.6,198.6 144.6,198.6 146.6,198.6 148.6,198.6 136.6,200.6 138.6,200.6 140.6,200.6 142.6,200.6 144.6,200.6 146.6,200.6 148.6,200.6
-VIN_200: C4.1 C6.2 C7.2 C8.2 C9.2 C10.2 C11.2 C12.2 C15.2 C16.1 C17.2 C24.1 C30.1 C33.1 R8.1 R9.1 R24.2 R32.2 VD5.2 VD6.2 VT3.3 VT4.3 X2.1 X2.2 X4.3
  other v1: 46.6,44.1 48.1,44.1 49.6,44.1 51.1,44.1 52.6,44.1 54.1,44.1 55.6,44.1 46.6,45.6 48.1,45.6 49.6,45.6 51.1,45.6 52.6,45.6 54.1,45.6 55.6,45.6 46.6,47.1 48.1,47.1 49.6,47.1 51.1,47.1 52.6,47.1 54.1,47.1 55.6,47.1 48.1,48.6 49.6,48.6 51.1,48.6 52.6,48.6 54.1,48.6 48.1,50.1 49.6,50.1 51.1,50.1 52.6,50.1 54.1,50.1 46.6,51.6 48.1,51.6 49.6,51.6 46.6,53.1 48.1,53.1 49.6,53.1 109.6,56.1 111.1,56.1 108.1,57.6 109.6,57.6 111.1,57.6 103.6,59.1 105.1,59.1 106.6,59.1 108.1,59.1 109.6,59.1 105.1,60.6 106.6,60.6 108.1,60.6 109.6,60.6 100.6,62.1 102.1,62.1 103.6,62.1 105.1,62.1 106.6,62.1 108.1,62.1 109.6,62.1 111.1,62.1 100.6,63.6 102.1,63.6 103.6,63.6 105.1,63.6 106.6,63.6 108.1,63.6 109.6,63.6 111.1,63.6 100.6,65.1 102.1,65.1 103.6,65.1 105.1,65.1 106.6,65.1 108.1,65.1 109.6,65.1 111.1,65.1 24.6,114.6 26.6,114.6 28.6,114.6 30.6,114.6 32.6,114.6 34.6,114.6 36.6,114.6 24.6,116.6 26.6,116.6 28.6,116.6 30.6,116.6 32.6,116.6 34.6,116.6 36.6,116.6 24.6,118.6 28.6,118.6 30.6,118.6 32.6,118.6 34.6,118.6 36.6,118.6 116.6,118.6 118.6,118.6 120.6,118.6 122.6,118.6 124.6,118.6 126.6,118.6 28.6,120.6 30.6,120.6 32.6,120.6 34.6,120.6 36.6,120.6 114.6,120.6 116.6,120.6 118.6,120.6 120.6,120.6 122.6,120.6 124.6,120.6 126.6,120.6 28.6,122.6 30.6,122.6 32.6,122.6 34.6,122.6 36.6,122.6 114.6,122.6 116.6,122.6 118.6,122.6 120.6,122.6 122.6,122.6 124.6,122.6 126.6,122.6 24.6,124.6 26.6,124.6 28.6,124.6 30.6,124.6 32.6,124.6 34.6,124.6 36.6,124.6 114.6,124.6 116.6,124.6 118.6,124.6 120.6,124.6 122.6,124.6 24.6,126.6 26.6,126.6 28.6,126.6 30.6,126.6 32.6,126.6 34.6,126.6 36.6,126.6 114.6,126.6 116.6,126.6 118.6,126.6 120.6,126.6 122.6,126.6 24.6,128.6 26.6,128.6 28.6,128.6 30.6,128.6 32.6,128.6 34.6,128.6 36.6,128.6 114.6,128.6 116.6,128.6 118.6,128.6 120.6,128.6 122.6,128.6 24.6,130.6 26.6,130.6 28.6,130.6 30.6,130.6 32.6,130.6 34.6,130.6 36.6,130.6 24.6,132.6 26.6,132.6 28.6,132.6 30.6,132.6 32.6,132.6 34.6,132.6 36.6,132.6 40.6,146.6 42.6,146.6 44.6,146.6 46.6,146.6 48.6,146.6 50.6,146.6 52.6,146.6 40.6,148.6 42.6,148.6 44.6,148.6 46.6,148.6 48.6,148.6 50.6,148.6 52.6,148.6 134.6,148.6 136.6,148.6 138.6,148.6 140.6,148.6 142.6,148.6 144.6,148.6 40.6,150.6 42.6,150.6 44.6,150.6 46.6,150.6 48.6,150.6 50.6,150.6 52.6,150.6 134.6,150.6 140.6,150.6 46.6,152.6 48.6,152.6 50.6,152.6 52.6,152.6 102.6,152.6 104.6,152.6 106.6,152.6 108.6,152.6 110.6,152.6 112.6,152.6 114.6,152.6 134.6,152.6 140.6,152.6 44.6,154.6 46.6,154.6 48.6,154.6 50.6,154.6 52.6,154.6 102.6,154.6 104.6,154.6 106.6,154.6 108.6,154.6 110.6,154.6 112.6,154.6 114.6,154.6 134.6,154.6 136.6,154.6 138.6,154.6 140.6,154.6 142.6,154.6 144.6,154.6 40.6,156.6 42.6,156.6 44.6,156.6 46.6,156.6 48.6,156.6 50.6,156.6 52.6,156.6 102.6,156.6 104.6,156.6 106.6,156.6 108.6,156.6 110.6,156.6 112.6,156.6 114.6,156.6 134.6,156.6 136.6,156.6 138.6,156.6 140.6,156.6 142.6,156.6 144.6,156.6 40.6,158.6 42.6,158.6 44.6,158.6 46.6,158.6 48.6,158.6 50.6,158.6 52.6,158.6 102.6,158.6 104.6,158.6 106.6,158.6 108.6,158.6 110.6,158.6 112.6,158.6 114.6,158.6 136.6,158.6 138.6,158.6 140.6,158.6 142.6,158.6 40.6,160.6 42.6,160.6 44.6,160.6 46.6,160.6 48.6,160.6 50.6,160.6 52.6,160.6 102.6,160.6 104.6,160.6 106.6,160.6 108.6,160.6 114.6,160.6 40.6,162.6 42.6,162.6 44.6,162.6 46.6,162.6 48.6,162.6 50.6,162.6 52.6,162.6 102.6,162.6 104.6,162.6 106.6,162.6 108.6,162.6 114.6,162.6 28.6,182.6 30.6,182.6 32.6,182.6 34.6,182.6 28.6,184.6 30.6,184.6 32.6,184.6 34.6,184.6 36.6,184.6 24.6,186.6 28.6,186.6 30.6,186.6 32.6,186.6 34.6,186.6 36.6,186.6 24.6,188.6 26.6,188.6 28.6,188.6 30.6,188.6 32.6,188.6 34.6,188.6 36.6,188.6 120.6,188.6 122.6,188.6 124.6,188.6 126.6,188.6 128.6,188.6 130.6,188.6 24.6,190.6 26.6,190.6 28.6,190.6 30.6,190.6 32.6,190.6 34.6,190.6 36.6,190.6 120.6,190.6 122.6,190.6 124.6,190.6 126.6,190.6 128.6,190.6 130.6,190.6 24.6,192.6 26.6,192.6 28.6,192.6 30.6,192.6 32.6,192.6 34.6,192.6 36.6,192.6 120.6,192.6 122.6,192.6 124.6,192.6 126.6,192.6 128.6,192.6 130.6,192.6 24.6,194.6 26.6,194.6 28.6,194.6 30.6,194.6 32.6,194.6 34.6,194.6 36.6,194.6 120.6,194.6 122.6,194.6 124.6,194.6 126.6,194.6 130.6,194.6 120.6,196.6 122.6,196.6 124.6,196.6 120.6,198.6 122.6,198.6 124.6,198.6 126.6,198.6 120.6,200.6 122.6,200.6 124.6,200.6 126.6,200.6 128.6,200.6 130.6,200.6 120.6,202.6 122.6,202.6 124.6,202.6 126.6,202.6 128.6,202.6 130.6,202.6 120.6,204.6 122.6,204.6 124.6,204.6 126.6,204.6 128.6,204.6 130.6,204.6
GND: X1.1 X1.2 X2.3 X2.4 X3.1 X3.2
  other v1: 148.6,146.6 150.6,146.6 152.6,146.6 154.6,146.6 148.6,148.6 150.6,148.6 152.6,148.6 154.6,148.6 150.6,150.6 150.6,152.6 148.6,154.6 150.6,154.6 152.6,154.6 154.6,154.6 148.6,156.6 150.6,156.6 152.6,156.6 154.6,156.6 148.6,168.6 150.6,168.6 152.6,168.6 154.6,168.6 148.6,170.6 150.6,170.6 152.6,170.6 154.6,170.6 150.6,172.6 150.6,174.6 148.6,176.6 150.6,176.6 152.6,176.6 154.6,176.6 148.6,178.6 150.6,178.6 152.6,178.6 154.6,178.6
GND_C1: C34.2 C35.2 C39.1 C40.1 C41.1 C62.2 DD1.4 L9.4 X7.3 X7.6 | length 56.9
  Top w0.5: DD1.4@20.905,26.525 20.905,25.095 21,25 22.25,25 v2(22.25,26.25)
  Top w0.75: v2(4.5,16) 4.9,16.4 L9.4@6.125,16.4 ; X7.3@13,11 13,13.75 14.25,14.999 C62.2@14.25,17.25 ; C62.2@14.3,17.25 v2(14.3,22.7) ; v2(18.875,21.125) 18.875,22.45
  Top w1: X7.6@6.992,11 6.992,8.758 7.5,8.25 12.5,8.25 13,8.75 X7.3@13,11
  Bottom w0.75: v2(4.5,16) C41.1@6.95,16 6.95,14.627 C40.1@6.2,13.878 ; v2(14.3,22.7) 17.95,22.7 19.75,24.5 C39.1@19.75,26.25 ; v2(18.875,21.125) 21.625,21.125 22.25,21.75 v2(22.25,26.25) C39.1@19.8,26.25
  Bottom w1: C40.1@6.2,13.878 6.2,11.792 X7.6@6.992,11
GND_C2: C48.2 C49.2 C53.1 C54.1 C57.1 C63.2 DD2.4 L10.4 X8.3 X8.6 | length 52.8
  Top w0.5: DD2.4@140.405,26.775 140.405,25.595 140.75,25.25 141,25.25 v2(141.5,24.75)
  Top w0.75: C48.2@137.75,22.45 C49.2@139,22.45 ; v2(139,21) C49.2@139,22.45 ; C49.2@139.504,22.45 C49.2@139,22.45 ; v2(142.25,22.75) 142.25,20.75 141.45,19.95 C63.2@141.45,15.25 141.45,14.3 143.5,12.25 X8.3@143.5,11
  Top w1: X8.3@143.5,11 143.5,9.75 144.25,9 148.75,9 149.508,9.758 X8.6@149.508,11 ; v2(145.1,17.85) 145.1,17.15 145.528,16.722 L10.4@147.425,16.722
  Bottom w0.5: C53.1@139.3,24.25 141,24.25 v2(141.5,24.75)
  Bottom w0.75: v2(139,21) 139.3,21.3 139.3,23.45 ; C53.1@139.3,24.25 139.3,23.45 ; v2(142.25,22.75) 140,22.75 139.3,23.45 ; C57.1@149.3,16.5 150,16.5 150.1,16.4
  Bottom w1: v2(145.1,17.85) 149.65,17.85 150.1,17.4 150.1,16.4 C54.1@150.1,14.5 150.1,12.835 149.508,12.242 X8.6@149.508,11
GND_DR_1: C37.1 C38.2 C43.1 C44.1 C45.2 C46.1 C47.1 DA1.3 DA1.5 DA3.1 DD1.5 DD3.5 R22.1 R24.1 VD12.1 VD14.1 | length 145.6
  Top w0.5: DD1.5@20.905,31.975 20.905,32.5 v1(22,32.5) ; DA1.3@36.73,72.775 36.75,72.755 v2(36.75,71.25) ; 39,71.25 39.25,71.5 DA1.5@39.25,72.795 ; v1(39.25,74.25) DA1.5@39.25,72.795 ; DA1.5@39.27,72.775 DA1.5@39.25,72.795
  Top w0.75: v2(12.5,33.5) VD14.1@12.5,34.775 ; C47.1@22,48 22,46.75 23.05,45.7 DA3.1@23.05,42.95 ; C47.1@22.05,48 23.75,48 24.5,47.25 v2(24.5,46.75) ; v2(36.75,71.25) 39,71.25 39,52.5 42.25,49.25 43.15,49.25 R24.1@43.4,49 ; v2(44.25,71) 44.25,71.95 45,72.7 VD12.1@44.75,72.95
  Top w1: VD14.1@12.5,34.775 14.275,34.775 14.75,35.25 v2(14.75,36.5) ; DA3.1@23.05,42.95 23.05,40.95 23.75,40.25 v2(23.75,36.5) ; v2(36,48.75) 36,66.5 v2(37,67.25)
  Bottom w0.5: v1(22,32.5) C37.1@20.05,32.5 20.05,33.05 20.5,33.5 21.5,33.5 22,34 C46.1@22,36.5 ; v1(39.25,74.25) 39.25,75.475 R22.1@39.275,75.5
  Bottom w0.75: DD3.5@6,34.678 7.928,34.678 9,35.75 C44.1@9,36.7 10.45,36.7 10.45,33.5 v2(12.5,33.5) ; C38.2@37,69.25 C38.2@36.8,69.25 36.8,71.2 v2(36.75,71.25) 36.75,72.5 37.25,73 43.75,73 44.25,72.5 v2(44.25,71)
  Bottom w1: v2(14.75,36.5) 14.75,38.75 15.5,39.5 17.85,39.5 C43.1@17.85,44.25 17.85,46.75 v2(24.5,46.75) 36,46.75 v2(36,48.75) ; C46.1@22.25,36.5 v2(23.75,36.5) ; v2(37,67.25) 37,69.25 C45.2@38.525,69.25
GND_DR_2: C51.1 C52.2 C56.1 C58.1 C59.2 C60.1 C61.1 DA4.3 DA4.5 DA6.1 DD2.5 DD4.5 R30.1 R32.1 VD17.1 VD19.1 | length 137.6
  Top w0.5: 117.73,72.77 DA4.3@117.73,73.775 ; 120.27,72.52 120.27,74.98 120.29,75 v1(120.5,75) ; DD2.5@140.405,32.225 140.405,32.905 140.75,33.25 141.25,33.25 141.75,32.75 v2(141.75,32.5)
  Top w0.75: 117.73,72.77 117.73,72.27 117.75,72.25 117.75,71.75 v2(118.25,71.25) 119.5,71.25 120.27,72.02 120.27,72.52 ; v2(126,72.5) 126,73.701 126.25,73.95 VD17.1@126,74.2 ; 139.25,46.75 138.75,46.75 138.05,47.45 C61.1@138.05,48.5 140,48.5 v2(140,49.65) ; 139.3,46.7 DA6.1@139.3,44.7 139.3,43.75 140.5,43.75 141.25,43 v2(141.25,36.25) ; v2(144.25,32.5) 144.25,34.025 VD19.1@144.5,34.275
  Top w1: R32.1@115.1,60 116.5,60 117.2,60.7 117.2,69.7 v2(117.25,69.75) ; v2(123.5,69) 123.5,58.75 124.75,57.5 v2(124.75,49.5)
  Bottom w0.5: v1(120.5,75) 120.5,76.475 R30.1@120.525,76.5 ; C60.1@139.85,36.25 139.85,34.1 139.3,33.55 C51.1@139.3,32.25 141.5,32.25 v2(141.75,32.5)
  Bottom w0.75: C52.2@119.45,71.25 v2(118.25,71.25) 118.25,72.25 118.75,72.75 125.75,72.75 v2(126,72.5) ; C60.1@139.85,36.25 v2(141.25,36.25) ; v2(144.25,32.5) 144.25,33 144.3,33.05 144.3,36.95 C58.1@145.25,36.95 145.25,35.75 145.84,35.16 DD4.5@147.5,35.16
  Bottom w1: C59.2@117.225,70 C59.2@117.225,70.75 117.225,70.975 117.5,71.25 v2(118.25,71.25) ; C52.2@119.45,71.25 119.45,70.05 119.85,69.65 122.85,69.65 v2(123.5,69) ; v2(124.75,49.5) 124.9,49.65 v2(140,49.65) 145.6,49.65 C56.1@145.6,47.5 145.6,45.35 145.25,45 143.75,45 142.5,43.75 142.5,38 143.55,36.95 144.3,36.95
GND_SINK: C1.2 C5.2 C7.1 C30.2 HS1.1 HS1.2 HS2.1 HS2.2 HS3.1 HS3.2 HS4.1 HS4.2 X9.1 X9.2
HI_G1: R19.2 VD10.1 VT1.1 | length 11.3
  Top w0.75: R19.2@47.35,101.25 47.35,98.95 VD10.1@47.8,98.5 55.525,98.5 VT1.1@55.95,98.925
HI_G2: R27.2 VD15.1 VT2.1 | length 10.7
  Top w1: VT2.1@101.85,88.025 101.85,86.4 102.25,86 VD15.1@107.7,86 107.65,85.95 R27.2@107.65,83
LOW_G3: R23.2 VD13.1 VT3.1 | length 12.2
  Top w1: R23.2@47.6,57.5 47.6,60.8 VD13.1@47.8,61 52,61 53,60 55.875,60 VT3.1@55.95,59.925
LOW_G4: R31.2 VD18.1 VT4.1 | length 12.6
  Top w1: VT4.1@101.85,49.025 106.525,49.025 107,49.5 108.25,49.5 ; VD18.1@109.7,49.5 108.25,49.5 ; R31.2@109.9,52.5 108.5,52.5 108.25,52.25 108.25,49.5
N1: C3.1 R2.2 VD2.1
N2: C29.1 R8.2 VD6.1
N3: C2.1 R3.2 VD3.1
N4: C26.1 R9.2 VD5.1
NetC34_1: C34.1 DD1.2 R17.2 | length 9.9
  Top w0.5: R17.2@17.5,19.025 16.725,19.025 16.275,19.475 16.275,23.275 17.05,24.05 C34.1@18,24.05 18,25.25 18.365,25.615 DD1.2@18.365,26.525
NetC35_1: C35.1 DD1.3 R18.2 | length 9.9
  Top w0.5: DD1.3@19.635,26.525 19.635,25.615 19.75,25.5 C35.1@19.75,24.05 19.8,24 20.75,24 21.25,23.5 21.25,19.5 20.775,19.025 R18.2@19.75,19.025
NetC36_1: C36.1 DA1.13 VD11.2 | length 4.5
  Top w0.5: 35.46,79.21 DA1.13@35.46,78.225 DA1.13@35.5,78.265
  Top w0.75: C36.1@35.025,82.5 35.025,80.645 35.46,80.21 35.46,79.21
NetC36_2: C36.2 DA1.11 R20.1 VD12.2 | length 24.3
  Top w0.5: DA1.11@38,78.225 38,79.25
  Top w0.75: 38,79.25 38,79.75 ; VD12.2@44.75,77.55 44.75,79.5 44.5,79.75 38,79.75 ; R20.1@46.15,86.5 39.5,86.5 38.5,85.5 38.5,82.525 C36.2@38.475,82.5 38.475,80.725 38,80.25 38,79.75
NetC42_1: C42.1 DD3.2 L9.3 | length 14.4
  Top w1: v2(4.25,20) 4.294,19.956 L9.3@6.125,19.956
  Bottom w1: v2(4.25,20) 6.1,20 C42.1@6.1,22.078 4.672,22.078 3.5,23.25 3.5,25.75 4.808,27.058 DD3.2@6,27.058
NetC42_2: C42.2 DD3.1 L9.2 | length 10.7
  Top w1: L9.2@9.275,19.956 9.319,20 v2(11,20)
  Bottom w1: DD3.1@6,24.518 8.232,24.518 9.3,23.45 C42.2@9.3,22.078 9.25,22.027 9.25,20 v2(11,20)
NetC44_2: C44.2 DD3.7 R21.1 | length 13.5
  Top w0.75: R21.1@12.5,42.05 v2(12.5,43.25)
  Bottom w0.75: DD3.7@6,39.758 8.242,39.758 9,39 C44.2@9,38.3 10.2,38.3 10.2,42.95 10.5,43.25 v2(12.5,43.25)
NetC48_1: C48.1 DD2.2 R25.2 | length 9.6
  Top w0.5: DD2.2@137.865,26.775 137.865,25.615 137.75,25.5 C48.1@137.75,24.05 136.55,24.05 136.25,23.75 136.25,21.75 138,20 R25.2@138,19.275